# Altium PCB Placa_Alimentacion_v3.PcbDoc (part 1 of 2)
Units mm, origin at the board's own origin, x right, y up, seen from the top; angles counter-clockwise.
Board outline 100 x 70 mm, 2 copper layers (Top Layer, Bottom Layer), stack 1.571 mm thick; 157 components, 80 nets, 555 pads, 135 vias.
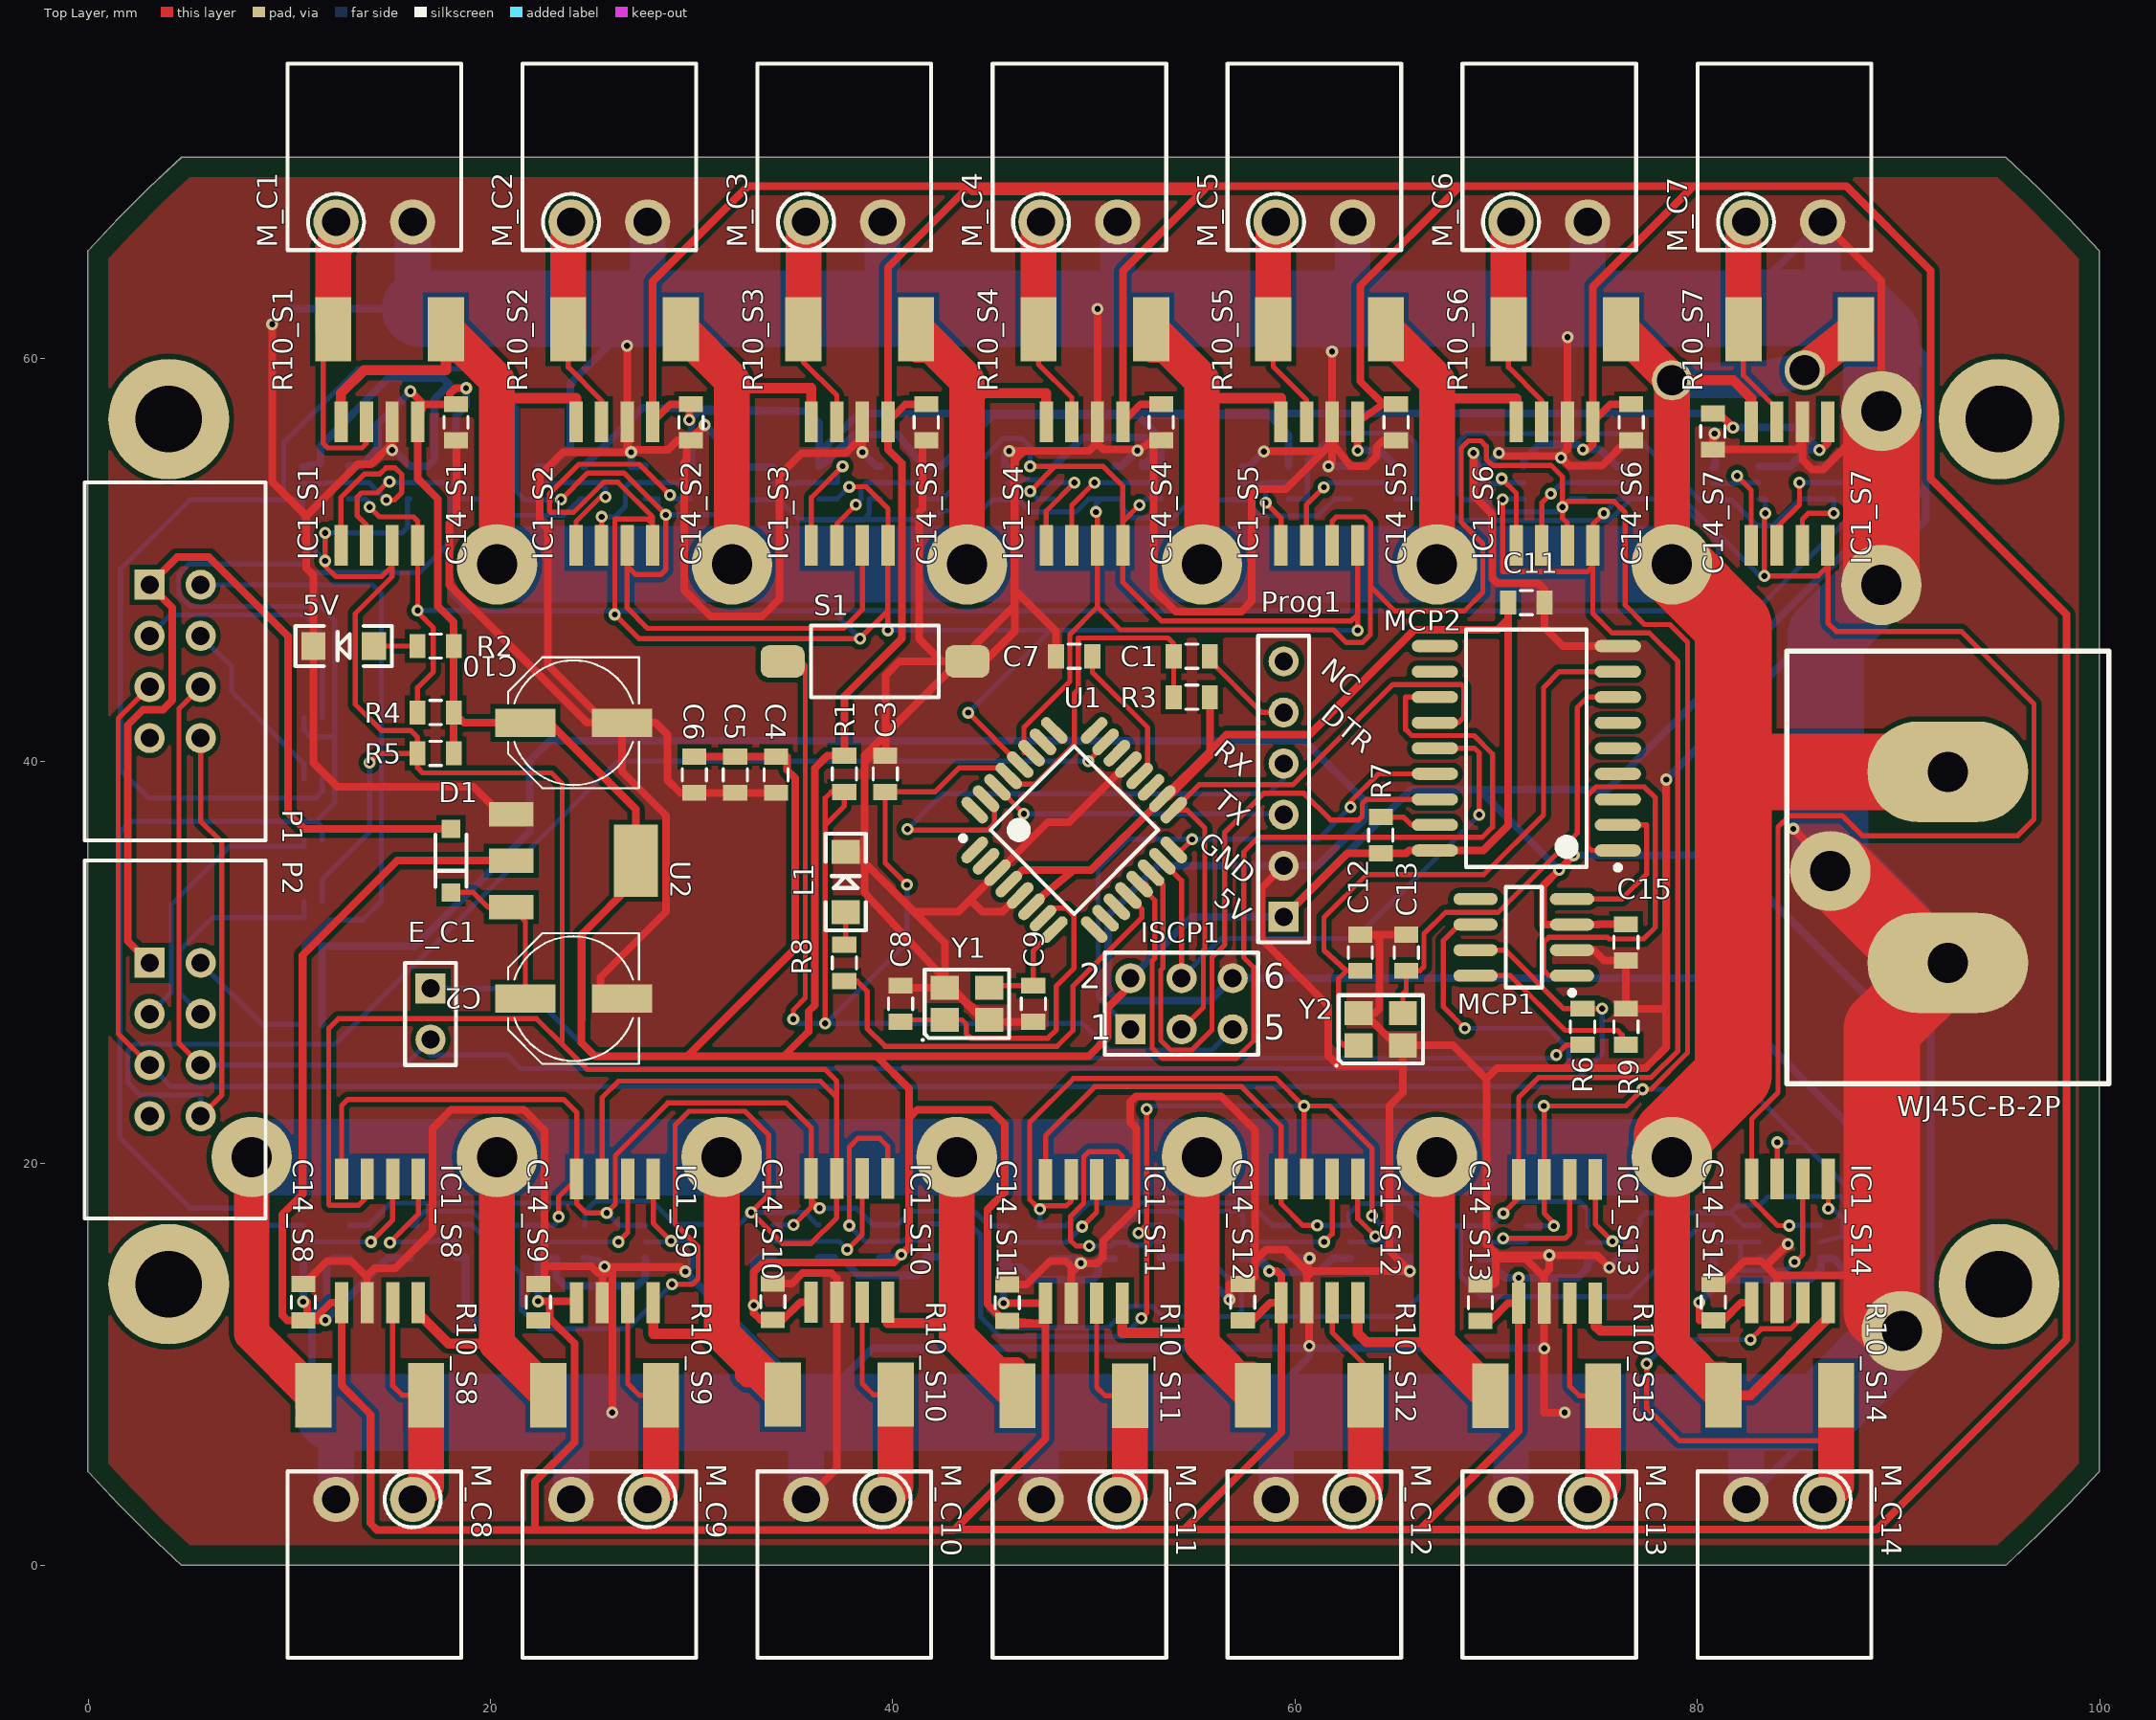
[diagram p0: Top Layer view]
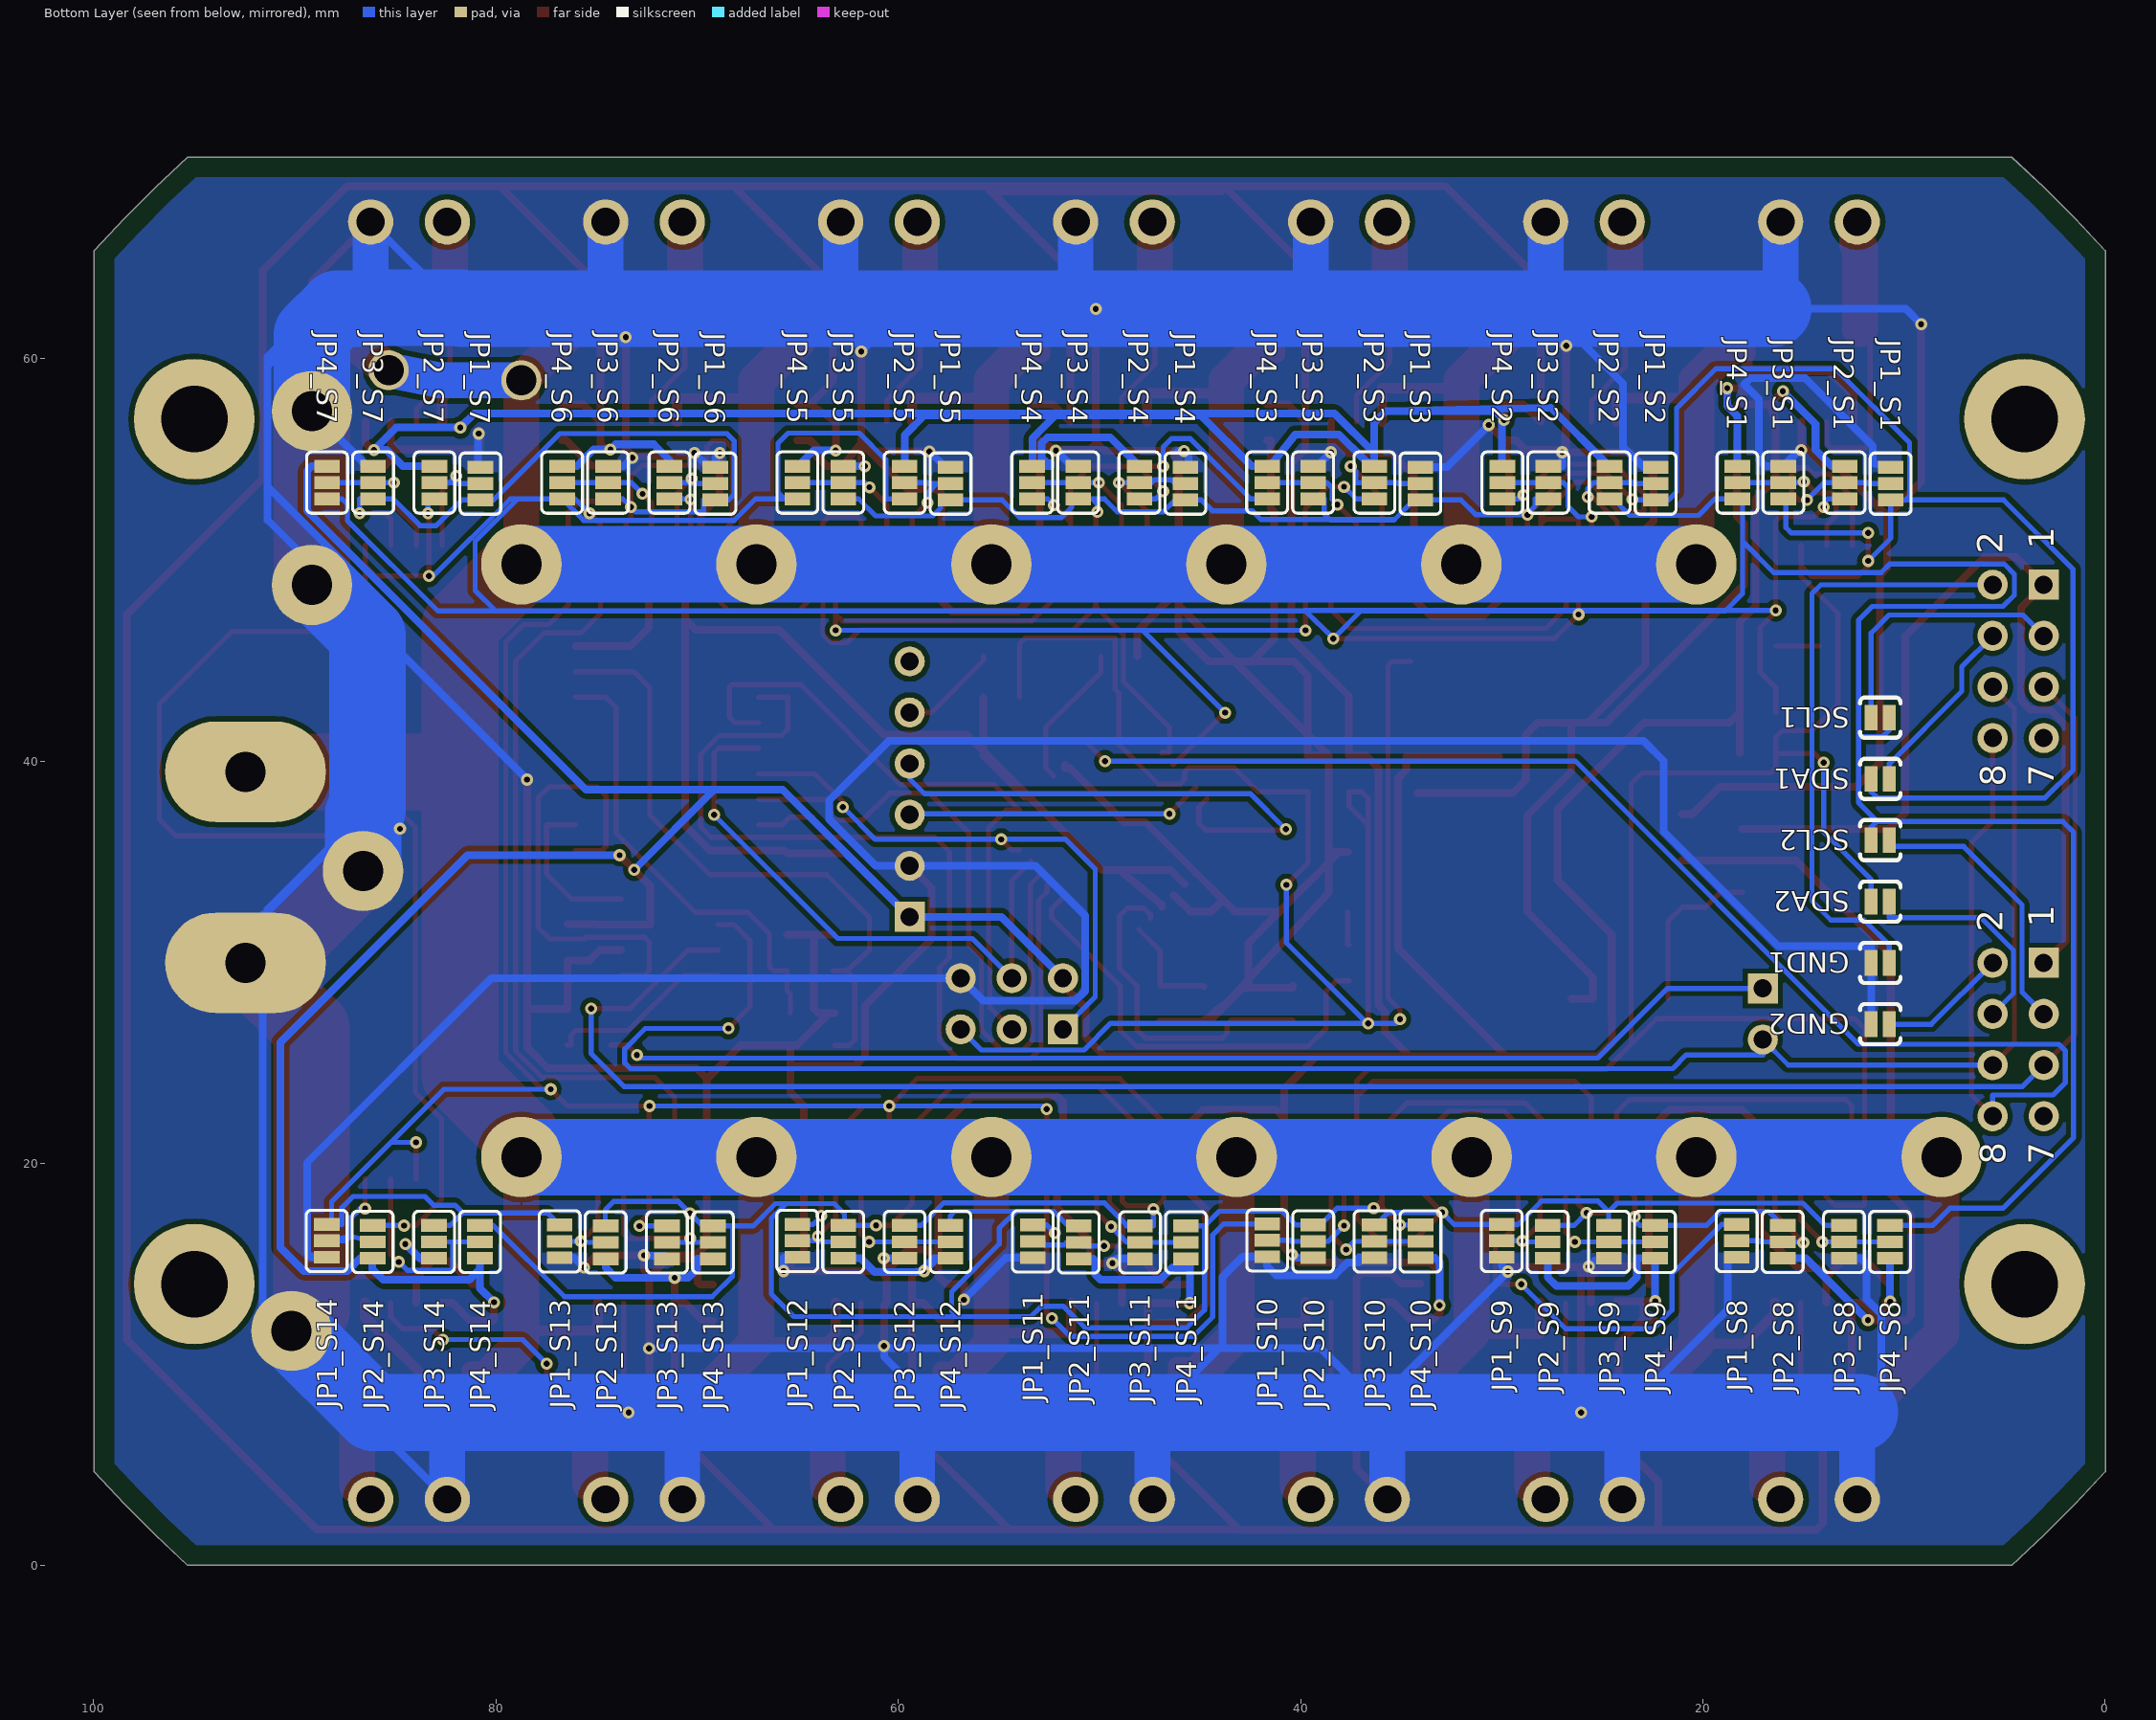
[diagram p1: Bottom Layer view, seen from below]
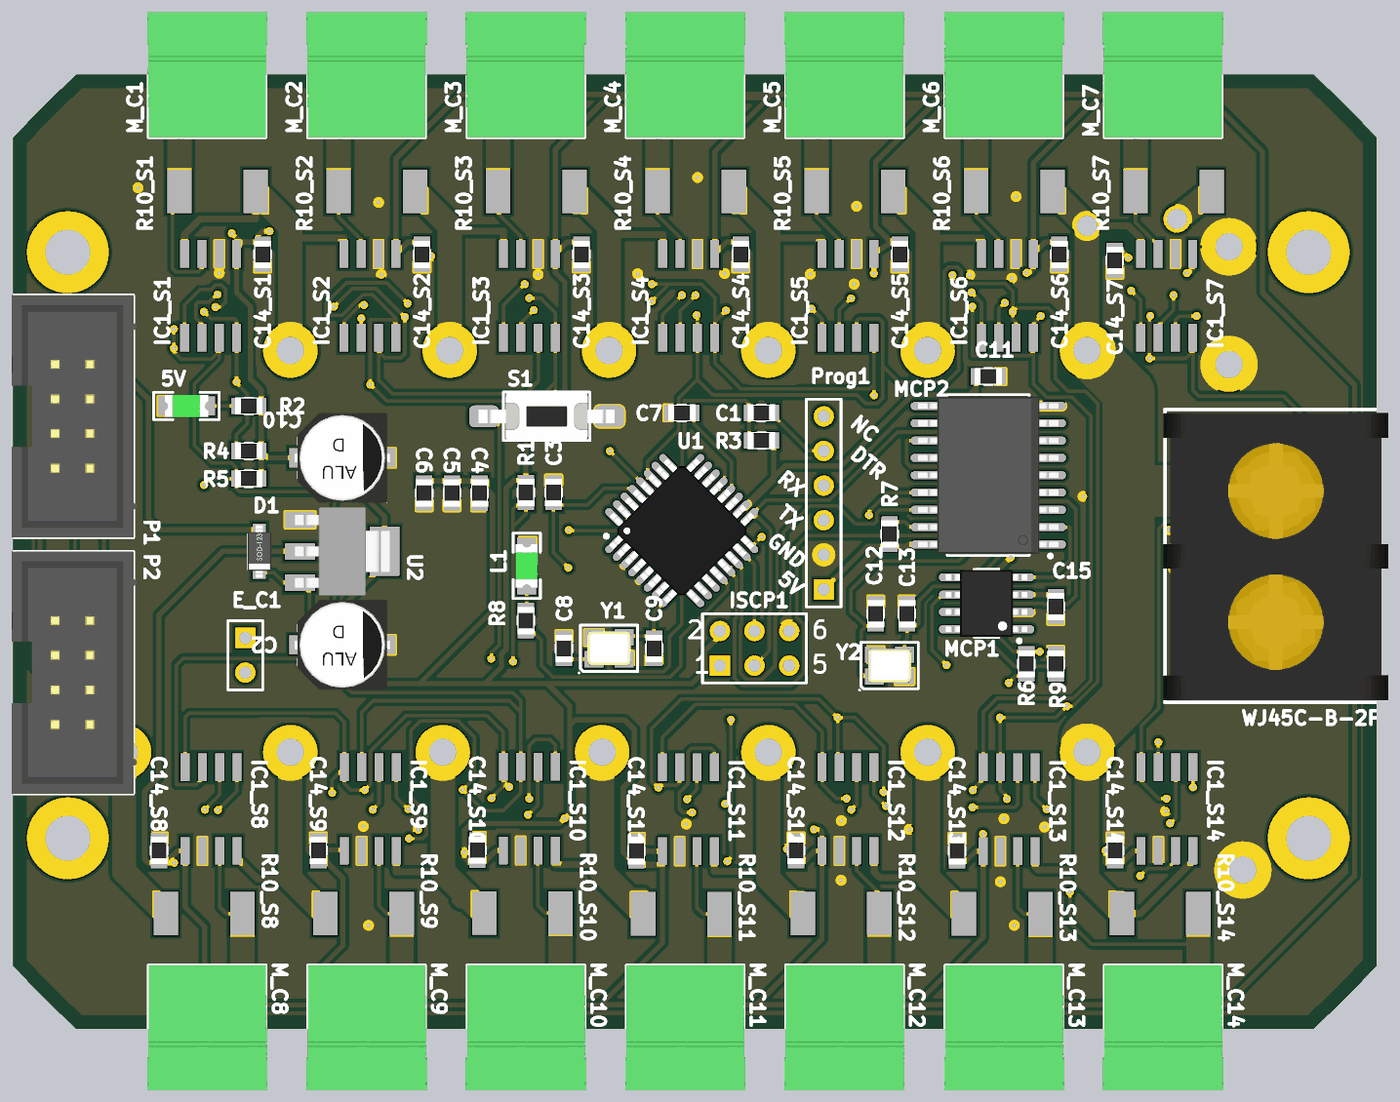
[diagram p3: 3D render of the assembled board from above, using the file's embedded part models]

## Layer stack, top to bottom
Top Solder: solder mask 0.0102, Solder Resist, Dk 3.5
Top Layer: signal copper 0.0356
Dielectric 1: dielectric 1.5, FR-4, Dk 4.8
Bottom Layer: signal copper 0.0356
Bottom Solder: solder mask 0.0102, Solder Resist, Dk 3.5

## Board outline
-0.016,49.637 -0.016,65.373 1.485,66.974 3.036,68.525 4.637,70.026 95.331,70.026 96.932,68.525 98.483,66.974 99.984,65.373 99.984,4.679 98.483,3.078 96.932,1.527 95.331,0.026 4.637,0.026 3.036,1.527 1.485,3.078 -0.016,4.679

## Design rules (kind name [scope] priority, off if disabled: settings)
BoardOutlineClearance [All] p1: gap=1 ignorepadtopadclearanceinfootprint=FALSE
Clearance Clearance_2 [InNamedPolygon('GND TOP PLANE')] p1: gap=0.254 ignorepadtopadclearanceinfootprint=FALSE
Clearance Clearance_1 [InNamedPolygon('GND BOTTOM PLANE')] p2: gap=0.254 ignorepadtopadclearanceinfootprint=FALSE
Clearance Clearance_JUMPER [InNet('GND') vs InNet('PGND')] p3: gap=0.05 ignorepadtopadclearanceinfootprint=FALSE
Clearance Clearance_POWER [InNet('24V') vs InNet('PGND')] p4: gap=0.381 ignorepadtopadclearanceinfootprint=FALSE
Clearance [All] p5: gap=0.152 ignorepadtopadclearanceinfootprint=FALSE
HoleSize [All] p1: absolutevalues=TRUE maxlimit=6.3 minlimit=0.3 maxpercent=80.000 minpercent=20.000
PlaneClearance [All] p1: clearance=5.016
PlaneConnect [All] p1: planeconnectstyle=Relief reliefexpansion=0.508 reliefentries=4 reliefconductorwidth=0.381 reliefairgap=-0.05
PolygonConnect [All] p1: connectstyle=Relief reliefconductorwidth=0.254 reliefentries=4 polygonreliefangle="90 Angle" airgapwidth=-0.05
RoomDefinition S14 [InComponentClass('S14')] p1: confinementstyle=ConfineIn formatcopy=TRUE lockcomponents=FALSE outline 90.83,21.26 77.368,21.26 77.368,5.512 90.83,5.512
RoomDefinition S13 [InComponentClass('S13')] p2: confinementstyle=ConfineIn formatcopy=TRUE lockcomponents=FALSE outline 79.248,21.234 65.786,21.234 65.786,5.486 79.248,5.486
RoomDefinition S12 [InComponentClass('S12')] p3: confinementstyle=ConfineIn formatcopy=TRUE lockcomponents=FALSE outline 67.437,21.26 53.975,21.26 53.975,5.512 67.437,5.512
RoomDefinition S11 [InComponentClass('S11')] p4: confinementstyle=ConfineIn formatcopy=TRUE lockcomponents=FALSE outline 55.728,21.234 42.266,21.234 42.266,5.486 55.728,5.486
RoomDefinition S10 [InComponentClass('S10')] p5: confinementstyle=ConfineIn formatcopy=TRUE lockcomponents=FALSE outline 44.069,21.285 30.607,21.285 30.607,5.537 44.069,5.537
RoomDefinition S9 [InComponentClass('S9')] p6: confinementstyle=ConfineIn formatcopy=TRUE lockcomponents=FALSE outline 32.41,21.26 18.948,21.26 18.948,5.512 32.41,5.512
RoomDefinition S8 [InComponentClass('S8')] p7: confinementstyle=ConfineIn formatcopy=TRUE lockcomponents=FALSE outline 20.726,21.26 7.264,21.26 7.264,5.512 20.726,5.512
RoomDefinition S7 [InComponentClass('S7')] p8: confinementstyle=ConfineIn formatcopy=TRUE lockcomponents=FALSE outline 78.238,48.717 91.7,48.717 91.7,64.465 78.238,64.465
RoomDefinition S6 [InComponentClass('S6')] p9: confinementstyle=ConfineIn formatcopy=TRUE lockcomponents=FALSE outline 66.554,48.717 80.016,48.717 80.016,64.465 66.554,64.465
RoomDefinition S5 [InComponentClass('S5')] p10: confinementstyle=ConfineIn formatcopy=TRUE lockcomponents=FALSE outline 54.858,48.717 68.32,48.717 68.32,64.465 54.858,64.465
RoomDefinition S4 [InComponentClass('S4')] p11: confinementstyle=ConfineIn formatcopy=TRUE lockcomponents=FALSE outline 43.186,48.717 56.648,48.717 56.648,64.465 43.186,64.465
RoomDefinition S3 [InComponentClass('S3')] p12: confinementstyle=ConfineIn formatcopy=TRUE lockcomponents=FALSE outline 31.502,48.717 44.964,48.717 44.964,64.465 31.502,64.465
RoomDefinition S2 [InComponentClass('S2')] p13: confinementstyle=ConfineIn formatcopy=TRUE lockcomponents=FALSE outline 19.806,48.717 33.268,48.717 33.268,64.465 19.806,64.465
RoomDefinition S1 [InComponentClass('S1')] p14: confinementstyle=ConfineIn formatcopy=TRUE lockcomponents=FALSE outline 8.122,48.717 21.584,48.717 21.584,64.465 8.122,64.465
RoutingVias RoutingVias_24V [InNet('24V')] p1: holewidth=0.5 width=0.8 viastyle="Through Hole" minholewidth=0.3 minwidth=0.6 maxholewidth=1 maxwidth=1.2
RoutingVias RoutingVias_PGND [InNet('PGND')] p2: holewidth=0.5 width=0.8 viastyle="Through Hole" minholewidth=0.3 minwidth=0.6 maxholewidth=1 maxwidth=1.2
RoutingVias RoutingVias_PGNDC [InNet('PGNDC')] p3: holewidth=0.5 width=0.8 viastyle="Through Hole" minholewidth=0.3 minwidth=0.6 maxholewidth=1 maxwidth=1.2
RoutingVias RoutingVias_MOTOR1 [InNet('MOTOR1')] p4: holewidth=0.5 width=0.8 viastyle="Through Hole" minholewidth=0.3 minwidth=0.6 maxholewidth=1 maxwidth=1.2
RoutingVias RoutingVias_MOTOR2 [InNet('MOTOR2')] p5: holewidth=0.5 width=0.8 viastyle="Through Hole" minholewidth=0.3 minwidth=0.6 maxholewidth=1 maxwidth=1.2
RoutingVias RoutingVias_C17_1 [InNet('NetC17_+')] p6: holewidth=0.5 width=0.8 viastyle="Through Hole" minholewidth=0.3 minwidth=0.6 maxholewidth=1 maxwidth=1.2
RoutingVias [All] p7: holewidth=0.3 width=0.6 viastyle="Through Hole" minholewidth=0.3 minwidth=0.6 maxholewidth=1 maxwidth=1.2
SMDNeckDown [All] p1: percent=120.000
SilkToSilkClearance [All] p1 off: silktosilkclearance=0.127
SolderMaskExpansion [All] p1: expansion=0.102
Width Width_Motor1 [InNet('MOTOR1')] p1: maxlimit=0.889 minlimit=0.7 preferedwidth=0.8
Width Width_Motor2 [InNet('MOTOR2')] p2: maxlimit=0.889 minlimit=0.7 preferedwidth=0.8
Width Width_24V [InNet('24V')] p3: maxlimit=10 minlimit=0.5 preferedwidth=0.8
Width Width_PGND [InNet('PGND')] p4: maxlimit=10 minlimit=0.6 preferedwidth=0.8
Width Width_PGNDC [InNet('PGNDC')] p5: maxlimit=10 minlimit=0.6 preferedwidth=0.8
Width Width_GND [InNet('GND')] p6: maxlimit=10 minlimit=0.254 preferedwidth=0.381 checkconnectedcopper=TRUE
Width Width_Vin [InNet('Vin')] p7: maxlimit=0.508 minlimit=0.254 preferedwidth=0.381 checkconnectedcopper=TRUE
Width Width_C17_1 [InNet('NetC17_+')] p8: maxlimit=0.508 minlimit=0.254 preferedwidth=0.381 checkconnectedcopper=TRUE
Width Width_5V [InNet('5V')] p9: maxlimit=0.381 minlimit=0.254 preferedwidth=0.381 checkconnectedcopper=TRUE
Width [All] p10: maxlimit=10 minlimit=0.254 preferedwidth=0.254
26 further rules are at their usual default settings.

## Classes and differential pairs
component class C1: M_C1
component class C2: M_C2
component class C3: M_C3
component class C4: M_C4
component class C5: M_C5
component class C6: M_C6
component class C7: M_C7
component class C8: M_C8
component class C9: M_C9
component class C10: M_C10
component class C11: M_C11
component class C12: M_C12
component class C13: M_C13
component class C14: M_C14
component class Placa_Alimentación: 5V C1 C2 C3 C4 C5 C6 C7 C8 C9 C10 C11 C12 C13 C15 D1 E_C1 GND GND1 GND2 ISCP1 L1 MCP1 MCP2 P1 P2 Prog1 R1 R2 R3 R4 R5 R6 R7 R8 R9 S1 SCL SCL1 SCL2 SDA SDA1 SDA2 U1 WJ45C-B-2P Y1 Y2
component class S1: C14_S1 JP1_S1 JP2_S1 JP3_S1 JP4_S1 R10_S1
component class S2: C14_S2 JP1_S2 JP2_S2 JP3_S2 JP4_S2 R10_S2
component class S3: C14_S3 JP1_S3 JP2_S3 JP3_S3 JP4_S3 R10_S3
component class S4: C14_S4 JP1_S4 JP2_S4 JP3_S4 JP4_S4 R10_S4
component class S5: C14_S5 JP1_S5 JP2_S5 JP3_S5 JP4_S5 R10_S5
component class S6: C14_S6 JP1_S6 JP2_S6 JP3_S6 JP4_S6 R10_S6
component class S7: C14_S7 JP1_S7 JP2_S7 JP3_S7 JP4_S7 R10_S7
component class S8: C14_S8 JP1_S8 JP2_S8 JP3_S8 JP4_S8 R10_S8
component class S9: C14_S9 JP1_S9 JP2_S9 JP3_S9 JP4_S9 R10_S9
component class S10: C14_S10 JP1_S10 JP2_S10 JP3_S10 JP4_S10 R10_S10
component class S11: C14_S11 JP1_S11 JP2_S11 JP3_S11 JP4_S11 R10_S11
component class S12: C14_S12 JP1_S12 JP2_S12 JP3_S12 JP4_S12 R10_S12
component class S13: C14_S13 JP1_S13 JP2_S13 JP3_S13 JP4_S13 R10_S13
component class S14: C14_S14 JP1_S14 JP2_S14 JP3_S14 JP4_S14 R10_S14
channel class Conector_Motor: C1 C2 C3 C4 C5 C6 C7 C8 C9 C10 C11 C12 C13 C14 C15 C16
channel class Sensor_Conjunto: S1 S2 S3 S4 S5 S6 S7 S8 S9 S10 S11 S12 S13 S14 S15 S16
net class Motor_Bus[1..14]: Motor_Bus1 Motor_Bus2 Motor_Bus3 Motor_Bus4 Motor_Bus5 Motor_Bus6 Motor_Bus7 Motor_Bus8 Motor_Bus9 Motor_Bus10 Motor_Bus11 Motor_Bus12 Motor_Bus13 Motor_Bus14

## Components (designator, comment, footprint, x,y, rotation, side; value= is the part's Value field where it differs from the comment)
5V "1206 LED" LED-1206 12.7,45.72 r180 top
C1 "100n" 0805 54.864,45.212 r0 top
C2 "47u" PANASONIC_D 24.13,28.194 r180 top
C3 "22p" 0805 39.624,39.37 r90 top
C4 "100n" 0805 34.198,39.324 r270 top
C5 "100n" 0805 32.166,39.324 r270 top
C6 "100n" 0805 30.134,39.324 r270 top
C7 "100n" 0805 49.022,45.212 r180 top
C8 "22p" 0805 40.386,27.94 r90 top
C9 "22p" 0805 46.99,27.94 r270 top
C10 "47u" PANASONIC_D 24.13,41.91 r180 top
C11 "100n" 0805 71.501,47.879 r0 top
C12 "22p" 0805 63.246,30.48 r90 top
C13 "22p" 0805 65.532,30.48 r90 top
C14_S1 "100n" 0805 18.282,56.845 r270 top (schematic designator C14)
C14_S2 "100n" 0805 29.966,56.845 r270 top (schematic designator C14)
C14_S3 "100n" 0805 41.662,56.845 r270 top (schematic designator C14)
C14_S4 "100n" 0805 53.346,56.845 r270 top (schematic designator C14)
C14_S5 "100n" 0805 65.018,56.845 r270 top (schematic designator C14)
C14_S6 "100n" 0805 76.714,56.845 r270 top (schematic designator C14)
C14_S7 "100n" 0805 80.772,56.388 r270 top (schematic designator C14)
C14_S8 "100n" 0805 10.693,13.106 r90 top (schematic designator C14)
C14_S9 "100n" 0805 22.377,13.106 r90 top (schematic designator C14)
C14_S10 "100n" 0805 34.036,13.132 r90 top (schematic designator C14)
C14_S11 "100n" 0805 45.695,13.081 r90 top (schematic designator C14)
C14_S12 "100n" 0805 57.404,13.106 r90 top (schematic designator C14)
C14_S13 "100n" 0805 69.215,13.081 r90 top (schematic designator C14)
C14_S14 "100n" 0805 80.797,13.106 r90 top (schematic designator C14)
C15 "100n" 0805 76.454,30.988 r270 top
D1 "SOD123-1A" SOD-123 18.034,35.052 r90 top
E_C1 "Header 2" HDR1X2 17.018,28.702 r270 top
GND1 "JUMPER-PAD-2-NOYES_SILK" PAD-JUMPER-2-NO_YES_SILK 11.176,29.972 r0 bottom
GND2 "JUMPER-PAD-2-NOYES_SILK" PAD-JUMPER-2-NO_YES_SILK 11.176,26.924 r0 bottom
IC1_S1 "INA219" SO08 14.472,53.797 r90 top (schematic designator IC1)
IC1_S2 "INA219" SO08 26.156,53.797 r90 top (schematic designator IC1)
IC1_S3 "INA219" SO08 37.852,53.797 r90 top (schematic designator IC1)
IC1_S4 "INA219" SO08 49.536,53.797 r90 top (schematic designator IC1)
IC1_S5 "INA219" SO08 61.208,53.797 r90 top (schematic designator IC1)
IC1_S6 "INA219" SO08 72.904,53.797 r90 top (schematic designator IC1)
IC1_S7 "INA219" SO08 84.588,53.797 r90 top (schematic designator IC1)
IC1_S8 "INA219" SO08 14.503,16.154 r270 top (schematic designator IC1)
IC1_S9 "INA219" SO08 26.187,16.154 r270 top (schematic designator IC1)
IC1_S10 "INA219" SO08 37.846,16.18 r270 top (schematic designator IC1)
IC1_S11 "INA219" SO08 49.505,16.129 r270 top (schematic designator IC1)
IC1_S12 "INA219" SO08 61.214,16.154 r270 top (schematic designator IC1)
IC1_S13 "INA219" SO08 73.025,16.129 r270 top (schematic designator IC1)
IC1_S14 "INA219" SO08 84.607,16.154 r270 top (schematic designator IC1)
ISCP1 "Header 3X2" HDR2X3 51.816,26.67 r0 top
JP1_S1 "JUMPER-PAD-3-NOYES_SILK" PAD-JUMPER-3-NO_YES_SILK 10.662,53.797 r270 bottom (schematic designator JP1)
JP1_S2 "JUMPER-PAD-3-NOYES_SILK" PAD-JUMPER-3-NO_YES_SILK 22.346,53.797 r270 bottom (schematic designator JP1)
JP1_S3 "JUMPER-PAD-3-NOYES_SILK" PAD-JUMPER-3-NO_YES_SILK 34.042,53.797 r270 bottom (schematic designator JP1)
JP1_S4 "JUMPER-PAD-3-NOYES_SILK" PAD-JUMPER-3-NO_YES_SILK 45.726,53.797 r270 bottom (schematic designator JP1)
JP1_S5 "JUMPER-PAD-3-NOYES_SILK" PAD-JUMPER-3-NO_YES_SILK 57.398,53.797 r270 bottom (schematic designator JP1)
JP1_S6 "JUMPER-PAD-3-NOYES_SILK" PAD-JUMPER-3-NO_YES_SILK 69.094,53.797 r270 bottom (schematic designator JP1)
JP1_S7 "JUMPER-PAD-3-NOYES_SILK" PAD-JUMPER-3-NO_YES_SILK 80.778,53.797 r270 bottom (schematic designator JP1)
JP1_S8 "JUMPER-PAD-3-NOYES_SILK" PAD-JUMPER-3-NO_YES_SILK 18.313,16.154 r90 bottom (schematic designator JP1)
JP1_S9 "JUMPER-PAD-3-NOYES_SILK" PAD-JUMPER-3-NO_YES_SILK 29.997,16.154 r90 bottom (schematic designator JP1)
JP1_S10 "JUMPER-PAD-3-NOYES_SILK" PAD-JUMPER-3-NO_YES_SILK 41.656,16.18 r90 bottom (schematic designator JP1)
JP1_S11 "JUMPER-PAD-3-NOYES_SILK" PAD-JUMPER-3-NO_YES_SILK 53.315,16.129 r90 bottom (schematic designator JP1)
JP1_S12 "JUMPER-PAD-3-NOYES_SILK" PAD-JUMPER-3-NO_YES_SILK 65.024,16.154 r90 bottom (schematic designator JP1)
JP1_S13 "JUMPER-PAD-3-NOYES_SILK" PAD-JUMPER-3-NO_YES_SILK 76.835,16.129 r90 bottom (schematic designator JP1)
JP1_S14 "JUMPER-PAD-3-NOYES_SILK" PAD-JUMPER-3-NO_YES_SILK 88.417,16.154 r90 bottom (schematic designator JP1)
JP2_S1 "JUMPER-PAD-3-NOYES_SILK" PAD-JUMPER-3-NO_YES_SILK 12.948,53.848 r270 bottom (schematic designator JP2)
JP2_S2 "JUMPER-PAD-3-NOYES_SILK" PAD-JUMPER-3-NO_YES_SILK 24.632,53.848 r270 bottom (schematic designator JP2)
JP2_S3 "JUMPER-PAD-3-NOYES_SILK" PAD-JUMPER-3-NO_YES_SILK 36.328,53.848 r270 bottom (schematic designator JP2)
JP2_S4 "JUMPER-PAD-3-NOYES_SILK" PAD-JUMPER-3-NO_YES_SILK 48.012,53.848 r270 bottom (schematic designator JP2)
JP2_S5 "JUMPER-PAD-3-NOYES_SILK" PAD-JUMPER-3-NO_YES_SILK 59.684,53.848 r270 bottom (schematic designator JP2)
JP2_S6 "JUMPER-PAD-3-NOYES_SILK" PAD-JUMPER-3-NO_YES_SILK 71.38,53.848 r270 bottom (schematic designator JP2)
JP2_S7 "JUMPER-PAD-3-NOYES_SILK" PAD-JUMPER-3-NO_YES_SILK 83.064,53.848 r270 bottom (schematic designator JP2)
JP2_S8 "JUMPER-PAD-3-NOYES_SILK" PAD-JUMPER-3-NO_YES_SILK 16.027,16.104 r90 bottom (schematic designator JP2)
JP2_S9 "JUMPER-PAD-3-NOYES_SILK" PAD-JUMPER-3-NO_YES_SILK 27.711,16.104 r90 bottom (schematic designator JP2)
JP2_S10 "JUMPER-PAD-3-NOYES_SILK" PAD-JUMPER-3-NO_YES_SILK 39.37,16.129 r90 bottom (schematic designator JP2)
JP2_S11 "JUMPER-PAD-3-NOYES_SILK" PAD-JUMPER-3-NO_YES_SILK 51.029,16.078 r90 bottom (schematic designator JP2)
JP2_S12 "JUMPER-PAD-3-NOYES_SILK" PAD-JUMPER-3-NO_YES_SILK 62.738,16.104 r90 bottom (schematic designator JP2)
JP2_S13 "JUMPER-PAD-3-NOYES_SILK" PAD-JUMPER-3-NO_YES_SILK 74.549,16.078 r90 bottom (schematic designator JP2)
JP2_S14 "JUMPER-PAD-3-NOYES_SILK" PAD-JUMPER-3-NO_YES_SILK 86.131,16.104 r90 bottom (schematic designator JP2)
JP3_S1 "JUMPER-PAD-3-NOYES_SILK" PAD-JUMPER-3-NO_YES_SILK 15.996,53.848 r270 bottom (schematic designator JP3)
JP3_S2 "JUMPER-PAD-3-NOYES_SILK" PAD-JUMPER-3-NO_YES_SILK 27.68,53.848 r270 bottom (schematic designator JP3)
JP3_S3 "JUMPER-PAD-3-NOYES_SILK" PAD-JUMPER-3-NO_YES_SILK 39.376,53.848 r270 bottom (schematic designator JP3)
JP3_S4 "JUMPER-PAD-3-NOYES_SILK" PAD-JUMPER-3-NO_YES_SILK 51.06,53.848 r270 bottom (schematic designator JP3)
JP3_S5 "JUMPER-PAD-3-NOYES_SILK" PAD-JUMPER-3-NO_YES_SILK 62.732,53.848 r270 bottom (schematic designator JP3)
JP3_S6 "JUMPER-PAD-3-NOYES_SILK" PAD-JUMPER-3-NO_YES_SILK 74.428,53.848 r270 bottom (schematic designator JP3)
JP3_S7 "JUMPER-PAD-3-NOYES_SILK" PAD-JUMPER-3-NO_YES_SILK 86.112,53.848 r270 bottom (schematic designator JP3)
JP3_S8 "JUMPER-PAD-3-NOYES_SILK" PAD-JUMPER-3-NO_YES_SILK 12.979,16.104 r90 bottom (schematic designator JP3)
JP3_S9 "JUMPER-PAD-3-NOYES_SILK" PAD-JUMPER-3-NO_YES_SILK 24.663,16.104 r90 bottom (schematic designator JP3)
JP3_S10 "JUMPER-PAD-3-NOYES_SILK" PAD-JUMPER-3-NO_YES_SILK 36.322,16.129 r90 bottom (schematic designator JP3)
JP3_S11 "JUMPER-PAD-3-NOYES_SILK" PAD-JUMPER-3-NO_YES_SILK 47.981,16.078 r90 bottom (schematic designator JP3)
JP3_S12 "JUMPER-PAD-3-NOYES_SILK" PAD-JUMPER-3-NO_YES_SILK 59.69,16.104 r90 bottom (schematic designator JP3)
JP3_S13 "JUMPER-PAD-3-NOYES_SILK" PAD-JUMPER-3-NO_YES_SILK 71.501,16.078 r90 bottom (schematic designator JP3)
JP3_S14 "JUMPER-PAD-3-NOYES_SILK" PAD-JUMPER-3-NO_YES_SILK 83.083,16.104 r90 bottom (schematic designator JP3)
JP4_S1 "JUMPER-PAD-3-NOYES_SILK" PAD-JUMPER-3-NO_YES_SILK 18.282,53.848 r270 bottom (schematic designator JP4)
JP4_S2 "JUMPER-PAD-3-NOYES_SILK" PAD-JUMPER-3-NO_YES_SILK 29.966,53.848 r270 bottom (schematic designator JP4)
JP4_S3 "JUMPER-PAD-3-NOYES_SILK" PAD-JUMPER-3-NO_YES_SILK 41.662,53.848 r270 bottom (schematic designator JP4)
JP4_S4 "JUMPER-PAD-3-NOYES_SILK" PAD-JUMPER-3-NO_YES_SILK 53.346,53.848 r270 bottom (schematic designator JP4)
JP4_S5 "JUMPER-PAD-3-NOYES_SILK" PAD-JUMPER-3-NO_YES_SILK 65.018,53.848 r270 bottom (schematic designator JP4)
JP4_S6 "JUMPER-PAD-3-NOYES_SILK" PAD-JUMPER-3-NO_YES_SILK 76.714,53.848 r270 bottom (schematic designator JP4)
JP4_S7 "JUMPER-PAD-3-NOYES_SILK" PAD-JUMPER-3-NO_YES_SILK 88.398,53.848 r270 bottom (schematic designator JP4)
JP4_S8 "JUMPER-PAD-3-NOYES_SILK" PAD-JUMPER-3-NO_YES_SILK 10.693,16.104 r90 bottom (schematic designator JP4)
JP4_S9 "JUMPER-PAD-3-NOYES_SILK" PAD-JUMPER-3-NO_YES_SILK 22.377,16.104 r90 bottom (schematic designator JP4)
JP4_S10 "JUMPER-PAD-3-NOYES_SILK" PAD-JUMPER-3-NO_YES_SILK 34.036,16.129 r90 bottom (schematic designator JP4)
JP4_S11 "JUMPER-PAD-3-NOYES_SILK" PAD-JUMPER-3-NO_YES_SILK 45.695,16.078 r90 bottom (schematic designator JP4)
JP4_S12 "JUMPER-PAD-3-NOYES_SILK" PAD-JUMPER-3-NO_YES_SILK 57.404,16.104 r90 bottom (schematic designator JP4)
JP4_S13 "JUMPER-PAD-3-NOYES_SILK" PAD-JUMPER-3-NO_YES_SILK 69.215,16.078 r90 bottom (schematic designator JP4)
JP4_S14 "JUMPER-PAD-3-NOYES_SILK" PAD-JUMPER-3-NO_YES_SILK 80.797,16.104 r90 bottom (schematic designator JP4)
L1 "1206 LED" LED-1206 37.654,33.99 r90 top
M_C1 "20020110-D021A01LF" "FCI 06-381-2PIN" 14.224,70.104 r0 top (schematic designator M)
M_C2 "20020110-D021A01LF" "FCI 06-381-2PIN" 25.908,70.104 r0 top (schematic designator M)
M_C3 "20020110-D021A01LF" "FCI 06-381-2PIN" 37.592,70.104 r0 top (schematic designator M)
M_C4 "20020110-D021A01LF" "FCI 06-381-2PIN" 49.276,70.104 r0 top (schematic designator M)
M_C5 "20020110-D021A01LF" "FCI 06-381-2PIN" 60.96,70.104 r0 top (schematic designator M)
M_C6 "20020110-D021A01LF" "FCI 06-381-2PIN" 72.644,70.104 r0 top (schematic designator M)
M_C7 "20020110-D021A01LF" "FCI 06-381-2PIN" 84.328,70.104 r0 top (schematic designator M)
M_C8 "20020110-D021A01LF" "FCI 06-381-2PIN" 14.224,0 r180 top (schematic designator M)
M_C9 "20020110-D021A01LF" "FCI 06-381-2PIN" 25.908,0 r180 top (schematic designator M)
M_C10 "20020110-D021A01LF" "FCI 06-381-2PIN" 37.592,0 r180 top (schematic designator M)
M_C11 "20020110-D021A01LF" "FCI 06-381-2PIN" 49.276,0 r180 top (schematic designator M)
M_C12 "20020110-D021A01LF" "FCI 06-381-2PIN" 60.96,0 r180 top (schematic designator M)
M_C13 "20020110-D021A01LF" "FCI 06-381-2PIN" 72.644,0 r180 top (schematic designator M)
M_C14 "20020110-D021A01LF" "FCI 06-381-2PIN" 84.328,0 r180 top (schematic designator M)
MCP1 "MCP2551T-I/SN" SOIC-SN8_N 71.374,31.242 r180 top
MCP2 "MCP2515T-E/SO" SOIC-SO18_N 71.501,40.64 r180 top
P1 "IDC2X4" IDC2X4 4.318,44.958 r270 top
P2 "IDC2X4" IDC2X4 4.318,26.162 r270 top
Prog1 "Header 6" HDR1X6 59.436,32.258 r90 top
R1 "10K" 0805 37.592,39.37 r90 top
R2 "560" 0805 17.272,45.72 r0 top
R3 "10K" 0805 54.864,43.18 r180 top
R4 "0" 0805 17.272,42.418 r0 top
R5 "0" 0805 17.272,40.386 r0 top
R6 "124" 0805 74.295,26.797 r270 top
R7 "10K" 0805 64.262,36.322 r270 top
R8 "560" 0805 37.592,29.972 r270 top
R9 "4.7K" 0805 76.454,26.797 r270 top
R10_S1 "0.012 2W" R2512 14.98,61.468 r0 top (schematic designator R10)
R10_S2 "0.012 2W" R2512 26.664,61.468 r0 top (schematic designator R10)
R10_S3 "0.012 2W" R2512 38.36,61.468 r0 top (schematic designator R10)
R10_S4 "0.012 2W" R2512 50.044,61.468 r0 top (schematic designator R10)
R10_S5 "0.012 2W" R2512 61.716,61.468 r0 top (schematic designator R10)
R10_S6 "0.012 2W" R2512 73.412,61.468 r0 top (schematic designator R10)
R10_S7 "0.012 2W" R2512 85.096,61.468 r0 top (schematic designator R10)
R10_S8 "0.012 2W" R2512 13.995,8.484 r180 top (schematic designator R10)
R10_S9 "0.012 2W" R2512 25.679,8.484 r180 top (schematic designator R10)
R10_S10 "0.012 2W" R2512 37.338,8.509 r180 top (schematic designator R10)
R10_S11 "0.012 2W" R2512 48.997,8.458 r180 top (schematic designator R10)
R10_S12 "0.012 2W" R2512 60.706,8.484 r180 top (schematic designator R10)
R10_S13 "0.012 2W" R2512 72.517,8.458 r180 top (schematic designator R10)
R10_S14 "0.012 2W" R2512 84.099,8.484 r180 top (schematic designator R10)
S1 "FSMSMTR" "TE FSMSMTR" 39.116,44.958 r90 top
SCL1 "JUMPER-PAD-2-NOYES_SILK" PAD-JUMPER-2-NO_YES_SILK 11.176,42.164 r0 bottom
SCL2 "JUMPER-PAD-2-NOYES_SILK" PAD-JUMPER-2-NO_YES_SILK 11.176,36.068 r180 bottom
SDA1 "JUMPER-PAD-2-NOYES_SILK" PAD-JUMPER-2-NO_YES_SILK 11.176,39.116 r0 bottom
SDA2 "JUMPER-PAD-2-NOYES_SILK" PAD-JUMPER-2-NO_YES_SILK 11.176,33.02 r0 bottom
U1 "ATmega328P-AU" 32A_N 49.022,36.576 r45 top
U2 "NCP1117" SOT223 24.13,35.052 r270 top
WJ45C-B-2P "WJ45C-B-2P" WJ45C-B-2P 92.456,29.972 r90 top
Y1 "16MHz" "NDK NX3225SA" 43.688,27.94 r0 top
Y2 "16MHz" "NDK NX3225SA" 64.262,26.67 r0 top

## Footprints (in the part's own frame and the unit in brackets; to place one, negate y for a bottom-side part, rotate by r counter-clockwise, add the part's x,y. Pads: shape width x height; smd on the part's side, far side on the other; paste and mask are expansions set on the pad)
32A_N [mm] "Thin QFP, 32-Leads, Body 7x7mm, Pitch 0.8mm, IPC Medium Density"
  oval 1.65x0.55 smd: 1(-4.2,2.8) 2(-4.2,2) 3(-4.2,1.2) 4(-4.2,0.4) 5(-4.2,-0.4) 6(-4.2,-1.2) 7(-4.2,-2) 8(-4.2,-2.8) 17(4.2,-2.8) 18(4.2,-2) 19(4.2,-1.2) 20(4.2,-0.4) 21(4.2,0.4) 22(4.2,1.2) 23(4.2,2) 24(4.2,2.8)
  oval 0.55x1.65 smd: 9(-2.8,-4.2) 10(-2,-4.2) 11(-1.2,-4.2) 12(-0.4,-4.2) 13(0.4,-4.2) 14(1.2,-4.2) 15(2,-4.2) 16(2.8,-4.2) 25(2.8,4.2) 26(2,4.2) 27(1.2,4.2) 28(0.4,4.2) 29(-0.4,4.2) 30(-1.2,4.2) 31(-2,4.2) 32(-2.8,4.2)
  silkscreen extent -4.32,-2.95 2.95,3.75, body extent -4.52,-4.53 4.5,4.5, height 1.15
0805 [mil]
  rect 31.5x47.24 smd: 1(-35.43,0) 2(35.43,0)
  silkscreen extent -12,-24 12,24, body extent -39,-25 39,25, height 20
"FCI 06-381-2PIN" [mm] "FCI Pluggable Terminal Block"
  round 2.25 hole 1.4: 1(-1.905,-3.302) 2(1.905,-3.302)
  silkscreen extent -4.32,-4.7 4.32,4.57, body extent -4.4,-4.7 4.4,4.5, height 7.6
HDR1X2 [mm] "Connector; Header; 2 Position"
  rect 1.5x1.5 hole 0.9: 1(0,0)
  round 1.5 hole 0.9: 2(2.54,0)
  silkscreen extent -1.27,-1.27 3.81,1.27
HDR1X6 [mm] "Connector; Header; 6 Position"
  rect 1.5x1.5 hole 0.9: 1(0,0)
  round 1.5 hole 0.9: 2(2.54,0) 3(5.08,0) 4(7.62,0) 5(10.16,0) 6(12.7,0)
  silkscreen extent -1.27,-1.27 13.97,1.27
HDR2X3 [mm] "Connector; Header; 3x2 Position"
  rect 1.5x1.5 hole 0.9: 1(0,0)
  round 1.5 hole 0.9: 2(0,2.54) 3(2.54,0) 4(2.54,2.54) 5(5.08,0) 6(5.08,2.54)
  silkscreen extent -1.27,-1.27 6.35,3.81
IDC2X4 [mm] "IDC Connector 2x4"
  rect 1.5x1.5 hole 0.9: 1(-3.81,-1.27)
  round 1.5 hole 0.9: 2(-3.81,1.27) 3(-1.27,-1.27) 4(-1.27,1.27) 5(1.27,-1.27) 6(1.27,1.27) 7(3.81,-1.27) 8(3.81,1.27)
  silkscreen extent -8.9,-4.5 8.9,4.5, body extent -8.89,-4.45 8.89,4.76, height 9.01
LED-1206 [mm]
  rect 1.2x1.4 smd: A(-1.5,0) C(1.5,0)
  silkscreen extent -2.4,-1 2.4,1, body extent -1.6,-0.8 1.6,0.8, height 1.11
"NDK NX3225SA" [mm] "Crystal, 4-Leads, Body 2.50x3.20mm, Pitch 2.20mm, IPC Medium Density"
  rect 1.4x1.2 smd: 1(-1.1,-0.8) 2(1.1,-0.8) 3(1.1,0.8) 4(-1.1,0.8)
  silkscreen extent -2.25,-1.85 2.1,1.7, body extent -1.61,-1.26 1.61,1.26, height 0.6
PAD-JUMPER-2-NO_YES_SILK [mm]
  rect 0.635x1.27 smd: 1(-0.45,0) 2(0.45,0)
  silkscreen extent -1,-1 1,1
PAD-JUMPER-3-NO_YES_SILK [mil]
  rect 25x50 smd: 1(-32,0) 2(0,0) 3(32,0)
  silkscreen extent -60,-40 60,40
PANASONIC_D [mm]
  rect 3x1.4 smd: +(2.4,0) -(-2.4,0)
  silkscreen extent -3.25,-3.25 3.25,3.25, body extent -3.5,-3.3 3.5,3.3, height 5.4
R2512 [mm]
  rect 1.8x3.2 smd: 1(-2.8,0) 2(2.8,0)
SO08 [mil]
  rect 80x26 smd: 1(-121,75) 2(-121,25) 3(-121,-25) 4(-121,-75) 5(121,-75) 6(121,-25) 7(121,25) 8(121,75)
SOD-123 [mm]
  rect 0.9x0.95 smd: A(1.575,0) C(-1.575,0)
  silkscreen extent -1.3,-0.77 1.3,0.77, body extent -1.93,-0.86 1.92,0.84, height 1.46
SOIC-SN8_N [mm] "SOIC, 8-Leads, Body 4.9x3.8mm, Pitch 1.27mm, IPC Medium Density"
  oval 2.2x0.6 smd: 1(-2.4,1.905) 2(-2.4,0.635) 3(-2.4,-0.635) 4(-2.4,-1.905) 5(2.4,-1.905) 6(2.4,-0.635) 7(2.4,0.635) 8(2.4,1.905)
  silkscreen extent -2.53,-2.5 0.9,2.88, body extent -3,-2.45 3,2.45, height 1.75
SOIC-SO18_N [mm] "SOIC, 18-Leads, Body 11.5x7.5mm, Pitch 1.27mm, IPC Medium Density"
  oval 2.3x0.6 smd: 1(-4.55,5.08) 2(-4.55,3.81) 3(-4.55,2.54) 4(-4.55,1.27) 5(-4.55,0) 6(-4.55,-1.27) 7(-4.55,-2.54) 8(-4.55,-3.81) 9(-4.55,-5.08) 10(4.55,-5.08) 11(4.55,-3.81) 12(4.55,-2.54) 13(4.55,-1.27) 14(4.55,0) 15(4.55,1.27) 16(4.55,2.54) 17(4.55,3.81) 18(4.55,5.08)
  silkscreen extent -4.67,-5.9 3,6.05, body extent -5.15,-5.77 5.15,5.76, height 2.65
SOT223 [mil]
  rect 48x88 smd: 1(-91,-122) 2(0,-122) 3(91,-122)
  rect 141.73x86.61 smd: 4(0,122.01)
  body extent -128,-136 128,136, height 63
"TE FSMSMTR" [mm]
  rrect50% 1.6x2.19 smd: 1(0,4.595) 2(0,-4.595)
  silkscreen extent -1.78,-3.17 1.78,3.17, body extent -1.75,-4.98 1.75,4.98, height 4.42
WJ45C-B-2P [mm]
  oval 5x8 hole 2: 1(0,0) 2(9.5,0)
  silkscreen extent -6,-8 15.5,8, body extent -5.83,-8.38 15.22,8.12, height 18.5

## Part data
5V L1: library part LED1206
C1 C3 C4 C5 C6 C7 C8 C9 C11 C12 C13 C14_S1 C14_S2 C14_S3 C14_S4 C14_S5 C14_S6 C14_S7 C14_S8 C14_S9 C14_S10 C14_S11 C14_S12 C14_S13 C14_S14 C15: library part CAP0805
C2 C10: library part 47UF-50V-20%(ELECT), PROD_ID=CAP-10547
D1: library part DIODESOD123
E_C1: "Header, 2-Pin", LatestRevisionDate=17-Jul-2002, LatestRevisionNote="Re-released for DXP Platform.", Publisher="Altium Limited"
IC1_S1 IC1_S2 IC1_S3 IC1_S4 IC1_S5 IC1_S6 IC1_S7 IC1_S8 IC1_S9 IC1_S10 IC1_S11 IC1_S12 IC1_S13 IC1_S14: library part INA219-SO8D
ISCP1: "Header, 3-Pin, Dual row", LatestRevisionDate=17-Jul-2002, LatestRevisionNote="Re-released for DXP Platform.", Publisher="Altium Limited"
M_C1 M_C2 M_C3 M_C4 M_C5 M_C6 M_C7 M_C8 M_C9 M_C10 M_C11 M_C12 M_C13 M_C14: "TERM BLOCK HDR 2POS R/A 3.81MM", Colour=Green, Manufacturer=FCI, Supplier Part Number 1=609-3819-ND, TemperatureRange="-40C ~ 115C", Voltage=300V, ComponentLink1Description=Datasheet, ComponentLink1URL=http://portal.fciconnect.com/Comergent//fci/drawing/20020110.pdf, ComponentLink2Description="Digi-Key Listing", ComponentLink2URL=http://www.digikey.ca/product-detail/en/20020110-D021A01LF/609-3819-ND/2261255, Number Of Levels=1, Number Of Positions=2, Orientation="90, Right Angle", PartId=7785, Part Number=20020110-D021A01LF, Pitch="0.150\" (3.81mm)", Positions Per Level=2, Price=0,75, Supplier 1=Digi-Key, Type="Through Hole"
MCP1: "High-Speed CAN Transceiver, 8-Pin SOIC, Industrial Temperature, Tape and Reel", Supplier Part Number 1=MCP2551T-I/SNTR-ND, Code_IPC=SOIC127P600-8, Code_JEDEC=MS-012, ComponentLink1Description=Datasheet, ComponentLink1URL=http://ww1.microchip.com/downloads/en/DeviceDoc/21667E.pdf, ComponentLink2Description="Packaging Specification", ComponentLink2URL=http://www.microchip.com/stellent/groups/techpub_sg/documents/packagingspec/en012702.pdf, ComponentLink3Description="Microchip.com Home", ComponentLink3URL=http://www.microchip.com/, DatasheetVersion="revE, Jan-2007", PackageDescription="8-Lead Plastic Small Outline (SN) - Narrow, 3.90mm Body [SOIC]", PackageReference=SOIC-SN8, PackageVersion="revBB, Aug-2009", Published=29-Jan-2009, Publisher="Altium Limited", Supplier 1=Digi-Key, Supplier 2=Farnell, Supplier Part Number 2=1788569
MCP2: "Stand-Alone CAN Controller With SPI Interface, 18-Pin SOIC, Extended Temperature, Tape and Reel", Supplier Part Number 1=MCP2515T-E/SO-ND, Code_JEDEC=MS-013, ComponentLink1Description=Datasheet, ComponentLink1URL=http://ww1.microchip.com/downloads/en/DeviceDoc/21801e.pdf, ComponentLink2Description="Packaging Specification", ComponentLink2URL=http://www.microchip.com/stellent/groups/techpub_sg/documents/packagingspec/en012702.pdf, ComponentLink3Description="Microchip.com Home", ComponentLink3URL=http://www.microchip.com/, DatasheetVersion="revE, Nov-2007", PackageDescription="18-Lead Plastic Small Outline (SO) - Wide 7.50mm Body [SOIC]", PackageReference=SOIC-SO18, PackageVersion="revBB, Aug-2009", Published=29-Jan-2009, Publisher="Altium Limited", Supplier 1=Digi-Key
P1 P2: "Header, 4-Pin, Dual row", LatestRevisionDate=17-Jul-2002, LatestRevisionNote="Re-released for DXP Platform.", Publisher="Altium Limited"
Prog1: "Header, 6-Pin", LatestRevisionDate=17-Jul-2002, LatestRevisionNote="Re-released for DXP Platform.", Publisher="Altium Limited"
R1 R2 R3 R4 R5 R6 R7 R8 R9: library part RESISTOR0805-RES
R10_S1 R10_S2 R10_S3 R10_S4 R10_S5 R10_S6 R10_S7 R10_S8 R10_S9 R10_S10 R10_S11 R10_S12 R10_S13 R10_S14: library part RESISTOR2512
S1: "SWITCH TACTILE SPST-NO 0.05A 24V", Contact Rating @ Voltage="0.05A @ 24VDC", Illumination Type, Colour=-, Manufacturer="TE Connectivity Alcoswitch Switches", Operating Force=180gf, Operating Temperature="-35C ~ 85C", Supplier Part Number 1=450-1758-2-ND, Actuator Orientation="Top Actuated", Actuator Type=Standard, Circuit=SPST-NO, ComponentLink1Description=Datasheet, ComponentLink1URL=http://www.te.com/commerce/DocumentDelivery/DDEController?Action=srchrtrv&DocNm=1437566-3&DocType=Customer+Drawing&DocLang=English, ComponentLink2Description="Digi-Key Listing", ComponentLink2URL=http://www.digikey.com/product-detail/en/FSMSMTR/450-1758-2-ND/529671, Illumination=Non-Illuminated, Illumination Voltage=-, Mechanical Life="20,000 Cycles", PartId=8251, Part Number=FSMSMTR, Price=0,175, Supplier 1=Digi-Key, Switch Function=Off-Mom, Switch Travel=0.25mm
U1: "8-bit AVR Microcontroller, 32KB Flash, 1KB EEPROM, 2KB SRAM, 32-pin TQFP, Industrial Grade (-40°C to 85°C)", Supplier Part Number 1=ATMEGA328P-AU-ND, Code_JEDEC=MS-026-ABA, ComponentLink1Description="Manufacturer Link", ComponentLink1URL=http://www.atmel.com/products/avr/default.asp?, ComponentLink2Description="ATmega48A/48PA/88A/88PA/168A/168PA/328/328P Datasheet", ComponentLink2URL=http://www.atmel.com/dyn/resources/prod_documents/8271.pdf, ComponentLink3Description="ATmega48A/48PA/88A/88PA/168A/168PA/328/328P Summary", ComponentLink3URL=http://www.atmel.com/dyn/resources/prod_documents/8271S.pdf, ComponentLink4Description="Atmel.com Home", ComponentLink4URL=http://www.atmel.com, DatasheetVersion="revA, Jan-2010", PackageDescription="32-Lead, 7x7x1.0 mm Body, 0.8mm Lead Pitch, Thin Profile Plastic Quad Flat Package (TQFP)", PackageReference=32A, PackageVersion="revB, Oct-2001", Published=1-Apr-2010, Publisher="Altium Limited", Supplier 1=Digi-Key, Supplier 2=Farnell, Supplier 3=Mouser, Supplier Part Number 2=1715486, Supplier Part Number 3=556-ATMEGA328P-AU
U2: library part V_REG_LM1117SOT223, PROD_ID=VREG-08170
Y1 Y2: library part NX3225SA-16.000MHZ-STD-CSR-1, "CRYSTAL 16.0000MHZ 8PF SMD", Device Package="4-SMD, No Lead (DFN, LCC)", Frequency Stability=15ppm, Load Capacitance=8pF, Manufacturer=NDK, Operating Mode=Fundamental, Supplier Part Number 1=644-1049-2-ND, ComponentLink1Description=Datasheet, ComponentLink1URL=http://media.digikey.com/pdf/Data%20Sheets/NDK%20PDFs/NX3225SA.pdf, ComponentLink2Description="Digi-Key Listing", ComponentLink2URL=http://www.digikey.com/product-detail/en/NX3225SA-16.000MHZ-STD-CSR-1/644-1049-2-ND/1128831, ESR="80 Ohm", Frequency=16MHz, Frequency Tolerance=15ppm, PartId=8509, Part Number=NX3225SA-16.000MHZ-STD-CSR-1, Price=0,3799, Supplier 1=Digi-Key, Type="MHz Crystal"

## Free pads (board coordinates)
  round 6 hole 3.3: 7(4,14) 9(4,57) 10(95,14) 10(95,57)
  round 4 hole 2: 12(78.74,20.32) 13(8.128,20.32) 14(20.32,20.32) 15(31.496,20.32) 16(43.18,20.32) 17(55.372,20.32) 18(67.056,20.32) 19(86.614,34.537) 19(89.154,48.761) 19(89.154,57.397) 19(90.17,11.677) 26(78.74,49.784) 27(67.056,49.784) 28(55.372,49.784) 29(43.688,49.784) 30(32.004,49.784) 31(20.32,49.784)
  round 2 hole 1.5: 34(78.74,58.928) 35(85.344,59.436)

## Via types
v1: diameter 0.6, hole 0.3, Top Layer to Bottom Layer, 135 vias

## Nets (pads, with @x,y where several pads share a name; then routed paths per layer and width w, separated by ;. In a path a pad name is that pad's centre, name@x,y a point inside that pad or via, vN(x,y) a via of type N, cw(c..) or ccw(c..) an arc to the next point about the centre after c; other vN are vias at no path point)
5V: C4.1 C5.1 C6.1 C10.+ C11.1 C14_S1.1 C14_S2.1 C14_S3.1 C14_S4.1 C14_S5.1 C14_S6.1 C14_S7.1 C14_S8.1 C14_S9.1 C14_S10.1 C14_S11.1 C14_S12.1 C14_S13.1 C14_S14.1 C15.1 IC1_S1.5 IC1_S2.5 IC1_S3.5 IC1_S4.5 IC1_S5.5 IC1_S6.5 IC1_S7.5 IC1_S8.5 IC1_S9.5 IC1_S10.5 IC1_S11.5 IC1_S12.5 IC1_S13.5 IC1_S14.5 ISCP1.2 JP2_S1.1 JP2_S2.1 JP2_S3.1 JP2_S4.1 JP2_S5.1 JP2_S6.1 JP2_S7.1 JP2_S8.1 JP2_S9.1 JP2_S10.1 JP2_S11.1 JP2_S12.1 JP2_S13.1 JP2_S14.1 JP4_S1.1 JP4_S2.1 JP4_S3.1 JP4_S4.1 JP4_S5.1 JP4_S6.1 JP4_S7.1 JP4_S8.1 JP4_S9.1 JP4_S10.1 JP4_S11.1 JP4_S12.1 JP4_S13.1 JP4_S14.1 MCP1.3 MCP2.18 Prog1.1 R1.2 R2.2 R3.1 R4.2 R5.2 R7.2 U1.4 U1.6 U1.18 U2.2 U2.4 | length 953.1
  Top Layer w0.381: v1(10.684,13.126) 10.887,13.126 C14_S8.1@10.887,12.206 ; v1(11.791,12.206) C14_S8.1@11.192,12.206 ; v1(16.02,58.391) IC1_S1.5@16.665,57.745 ; R5.2@18.172,40.386 R4.2@18.172,42.418 ; C14_S1.1@18.282,57.745 C14_S1.1@17.974,57.745 ; v1(18.787,58.544) 18.253,58.544 17.974,58.265 C14_S1.1@17.974,57.745 ; U2.2@21.031,35.052 15.358,35.052 10.659,30.353 10.659,18.485 9.643,17.469 9.643,12.46 9.897,12.206 C14_S8.1@10.693,12.206 C14_S8.1@10.887,12.206 ; v1(22.368,13.151) 22.955,13.151 ; C14_S9.1@22.377,12.206 23.034,12.206 ; IC1_S9.5@24.282,13.081 24.282,13.151 22.955,13.151 ; 24.539,27.153 24.539,31.391 ; v1(29.886,56.966) C14_S2.1@29.886,57.745 ; C14_S2.1@29.966,57.745 C14_S2.1@29.886,57.745 ; C6.1@30.134,40.224 C5.1@32.166,40.224 C4.1@34.198,40.224 34.738,40.224 34.738,39.567 35.144,39.161 35.144,30.688 29.799,25.343 ; IC1_S10.5@35.941,13.106 35.409,13.106 34.535,12.232 C14_S10.1@34.036,12.232 33.422,12.232 33.087,12.567 v1(33.087,12.954) 33.087,14.597 ; C14_S3.1@41.662,57.745 40.632,57.745 IC1_S3.5@39.757,56.871 ; 43.059,1.798 43.078,1.798 ; v1(45.507,13.056) IC1_S11.5@47.6,13.056 47.6,12.034 ; C14_S11.1@45.695,12.181 47.521,12.04 47.6,12.034 ; U1.4@45.769,33.889 46.453,34.573 46.451,34.575 46.445,34.581 48.979,34.581 ; U1.6@46.901,32.758 46.901,32.862 47.362,33.243 48.979,34.581 ; ISCP1.2@51.816,29.21 52.168,29.21 50.689,27.731 50.689,26.283 49.749,25.343 39.183,25.343 ; C14_S4.1@53.346,57.745 52.316,57.745 IC1_S4.5@51.441,56.871 51.441,64.373 55.388,68.32 ; 55.637,68.569 55.388,68.32 ; R3.1@55.764,43.18 55.764,40.49 ; C14_S12.1@57.404,12.206 57.903,12.206 58.777,13.081 IC1_S12.5@59.309,13.081 ; v1(58.721,14.65) 59.096,14.65 59.309,14.437 IC1_S12.5@59.309,13.081 ; Prog1.1@59.436,32.258 62.6,35.422 R7.2@64.262,35.422 65.523,35.422 65.661,35.56 MCP2.18@66.951,35.56 69.364,35.56 70.601,36.797 70.601,47.059 ; v1(63.113,55.442) IC1_S5.5@63.113,56.871 64.38,57.745 ; C14_S5.1@65.018,57.745 64.38,57.745 ; 68.58,68.58 68.195,68.58 ; C14_S13.1@69.215,12.181 69.714,12.181 70.588,13.056 IC1_S13.5@71.12,13.056 ; C11.1@70.601,47.879 70.601,47.059 ; v1(71.12,14.32) IC1_S13.5@71.12,13.056 ; v1(73.854,35.326) v1(73.13,34.602) 72.33,33.802 72.33,31.877 MCP1.3@73.774,31.877 75.098,31.877 75.109,31.888 C15.1@76.454,31.888 ; v1(74.311,55.493) 74.54,55.493 74.809,55.763 IC1_S6.5@74.809,56.871 ; C14_S6.1@76.714,57.745 75.684,57.745 IC1_S6.5@74.809,56.871 ; v1(80.102,13.101) 80.102,12.206 C14_S14.1@80.797,12.206 81.296,12.206 82.171,13.081 IC1_S14.5@82.702,13.081 ; C14_S7.1@80.772,57.288 81.076,57.288 v1(81.779,56.585) ; v1(86.071,55.468) 86.163,55.468 86.493,55.798 IC1_S7.5@86.493,56.871 ; C14_S8.1@10.887,12.206 C14_S8.1@11.192,12.206 ; C14_S8.1@11.192,12.206 12.067,13.081 IC1_S8.5@12.598,13.081 12.598,8.96 14.037,7.522 14.037,2.102 14.361,1.778 22.213,1.778 ; IC1_S1.5@16.665,57.745 C14_S1.1@17.974,57.745 ; IC1_S1.5@16.665,57.745 IC1_S1.5@16.377,56.871 16.377,54.042 17.39,53.029 17.39,47.691 18.172,46.908 R2.2@18.172,45.72 R4.2@18.172,42.418 ; R4.2@18.172,42.418 18.68,41.91 C10.+@21.73,41.91 22.927,41.91 27.229,37.608 U2.4@27.229,35.052 27.229,34.081 24.539,31.391 ; 22.213,1.778 43.059,1.778 43.078,1.798 ; 22.213,1.778 22.213,4.179 24.171,6.137 24.171,11.069 23.034,12.206 ; 22.955,13.151 22.955,12.285 23.034,12.206 ; 24.539,31.391 24.527,31.379 24.527,26.004 25.187,25.343 26.349,25.343 29.799,25.343 ; 29.799,25.343 34.594,25.343 ; C14_S2.1@29.886,57.745 28.935,57.745 IC1_S2.5@28.061,56.871 28.061,63.85 32.791,68.58 68.195,68.58 ; 33.087,14.597 33.569,15.08 ; 33.087,14.597 33.087,14.599 33.568,15.08 33.569,15.08 ; 33.569,15.08 40.045,15.08 v1(40.427,15.463) 40.808,15.844 40.808,16.352 40.808,22.27 ; 34.594,25.343 35.805,26.554 35.805,27.553 36.135,27.883 36.135,39.66 36.744,40.27 R1.2@37.592,40.27 37.592,43.234 40.453,46.095 40.453,54.798 39.757,55.493 IC1_S3.5@39.757,56.871 ; 34.594,25.343 39.183,25.343 ; 39.183,25.343 40.808,23.718 40.808,22.27 ; IC1_S3.5@39.757,56.871 39.757,64.536 43.745,68.523 43.948,68.32 55.388,68.32 ; 40.808,22.27 41.215,22.676 44.847,22.676 45.558,21.965 45.558,18.562 44.72,17.723 44.72,12.999 45.685,12.034 47.6,12.034 ; 43.078,1.798 54.483,1.798 ; 43.078,1.798 47.6,6.319 47.6,12.034 ; 48.979,34.581 49.855,34.581 U1.18@53.406,38.132 ; U1.18@53.406,38.132 U1.18@53.496,38.221 ; U1.18@53.406,38.132 53.406,38.221 U1.18@53.496,38.221 ; U1.18@53.496,38.221 55.764,40.49 ; U1.18@53.496,38.221 53.712,38.221 55.764,40.274 55.764,40.49 ; 54.483,1.798 66.208,1.798 ; 54.483,1.798 59.309,6.624 IC1_S12.5@59.309,13.081 ; 55.764,40.49 56.594,41.32 60.722,41.32 65.929,46.527 70.069,46.527 70.601,47.059 ; 64.38,57.745 63.237,58.888 63.237,63.621 68.195,68.58 ; 66.208,1.798 88.92,1.798 98.365,11.243 98.365,47.289 91.608,54.045 91.608,64.383 87.412,68.58 79.803,68.58 ; 66.208,1.798 71.12,6.709 IC1_S13.5@71.12,13.056 ; 68.195,68.58 79.803,68.58 ; IC1_S6.5@74.809,56.871 74.809,63.586 79.803,68.58
  Bottom Layer w0.381: v1(10.684,13.126) 10.684,15.291 JP4_S8.1@10.693,15.291 ; v1(11.791,12.206) 14.875,15.291 JP2_S8.1@16.027,15.291 ; JP2_S1.1@12.948,54.661 13.585,54.661 14.394,55.469 14.394,56.764 v1(16.02,58.391) ; JP4_S1.1@18.282,54.661 18.282,57.153 18.787,57.658 v1(18.787,58.544) ; v1(22.368,13.151) 22.368,15.291 JP4_S9.1@22.377,15.291 23.282,15.291 23.282,14.345 23.714,13.913 27.28,13.913 27.711,14.345 JP2_S9.1@27.711,15.291 ; JP2_S2.1@24.632,54.661 24.654,54.661 27.569,57.576 35.754,57.398 ; JP4_S2.1@29.966,54.661 29.988,54.661 29.988,56.865 v1(29.886,56.966) 30.318,57.398 35.754,57.398 ; v1(33.087,12.954) 33.087,15.075 33.328,15.316 JP4_S10.1@34.036,15.316 ; JP2_S10.1@39.37,15.316 40.281,15.316 v1(40.427,15.463) ; v1(45.507,13.056) 45.507,15.265 JP4_S11.1@45.695,15.265 45.695,14.841 46.358,14.841 46.982,14.216 49.952,14.216 50.214,14.478 50.214,15.166 50.314,15.265 JP2_S11.1@51.029,15.265 ; JP2_S4.1@48.012,54.661 48.022,54.661 49.464,56.103 52.579,56.103 52.866,55.816 52.866,55.074 52.594,54.802 52.416,54.802 52.416,54.661 JP4_S4.1@53.331,54.661 ; ISCP1.2@51.816,29.21 54.864,32.258 Prog1.1@59.436,32.258 65.755,38.577 69.155,38.577 ; JP4_S4.1@53.346,54.661 JP4_S4.1@53.331,54.661 ; JP4_S12.1@57.404,15.291 58.08,15.291 ; v1(58.721,14.65) 58.08,15.291 ; JP2_S5.1@59.684,54.661 59.681,54.661 59.681,56.204 58.69,57.195 52.188,57.195 ; JP2_S12.1@62.738,15.291 61.865,15.291 61.173,14.599 58.919,14.599 58.227,15.291 58.08,15.291 ; v1(63.113,55.442) 64.208,55.442 64.989,54.661 JP4_S5.1@65.018,54.661 ; JP4_S13.1@69.215,15.265 69.993,15.265 69.993,14.777 70.45,14.32 v1(71.12,14.32) 74.057,14.32 74.549,14.812 JP2_S13.1@74.549,15.265 JP2_S13.1@74.87,15.265 ; JP2_S6.1@71.38,54.661 71.39,54.661 71.39,54.985 72.152,55.747 74.057,55.747 v1(74.311,55.493) 75.149,55.493 75.982,54.661 JP4_S6.1@76.714,54.661 ; v1(73.13,34.602) 69.155,38.577 ; v1(73.854,35.326) 81.423,35.326 90.719,26.029 90.719,15.818 89.551,14.65 87.398,14.65 86.757,15.291 JP2_S14.1@86.147,15.291 ; v1(80.102,13.101) 80.797,13.796 80.797,14.752 ; JP4_S14.1@80.797,15.291 80.797,14.752 ; JP2_S7.1@83.064,54.661 84.629,54.661 85.436,55.468 v1(86.071,55.468) 84.954,56.585 v1(81.779,56.585) 81.076,57.288 38.311,57.288 36.338,55.315 ; JP2_S14.1@86.131,15.291 JP2_S14.1@86.147,15.291 ; JP4_S7.1@88.398,54.661 89.17,54.661 89.399,54.432 89.399,52.445 75.53,38.577 69.155,38.577 ; 35.754,57.398 36.338,56.814 36.338,55.315 ; JP2_S3.1@36.338,54.667 36.338,54.661 JP2_S3.1@36.328,54.661 JP2_S3.1@36.338,54.667 ; JP2_S3.1@36.338,54.667 36.846,54.999 38.093,56.246 40.259,56.246 41.52,54.661 JP4_S3.1@41.662,54.661 42.434,54.661 44.968,57.195 52.188,57.195 ; JP2_S3.1@36.338,54.667 36.338,55.315 ; 52.188,57.195 53.331,56.052 JP4_S4.1@53.331,54.661 ; 80.797,14.752 81.331,14.218 85.614,14.218 86.147,14.752 JP2_S14.1@86.147,15.291
24V: IC1_S1.8 IC1_S2.8 IC1_S3.8 IC1_S4.8 IC1_S5.8 IC1_S6.8 IC1_S7.8 IC1_S8.8 IC1_S9.8 IC1_S10.8 IC1_S11.8 IC1_S12.8 IC1_S13.8 IC1_S14.8 pad.12 pad.13 pad.14 pad.15 pad.16 pad.17 pad.18 pad.26 pad.27 pad.28 pad.29 pad.30 pad.31 pad.34 pad.35 R10_S1.2 R10_S2.2 R10_S3.2 R10_S4.2 R10_S5.2 R10_S6.2 R10_S7.2 R10_S8.2 R10_S9.2 R10_S10.2 R10_S11.2 R10_S12.2 R10_S13.2 R10_S14.2 WJ45C-B-2P.2 | length 467.7
  Top Layer w0.508: IC1_S1.8@12.567,56.871 12.567,58.287 13.716,59.436 17.78,59.436 R10_S1.2@17.78,61.468 ; IC1_S8.8@16.408,13.081 16.408,12.548 17.913,11.043 20.32,11.043 ; 20.453,58.045 24.251,58.045 IC1_S2.8@24.251,56.871 ; IC1_S9.8@28.092,13.081 28.092,11.532 31.477,11.532 ; 32.004,58.928 32.391,58.541 35.947,58.541 IC1_S3.8@35.947,56.871 ; IC1_S10.8@39.751,13.106 39.751,12.065 42.59,12.065 ; 44.329,58.299 47.631,58.299 IC1_S4.8@47.631,56.871 ; IC1_S11.8@51.41,13.056 51.41,11.582 54.807,11.582 ; 55.505,58.045 59.303,58.045 IC1_S5.8@59.303,56.871 ; IC1_S12.8@63.119,13.081 63.119,11.557 63.557,11.119 67.056,11.119 ; 67.177,58.033 70.999,58.033 IC1_S6.8@70.999,56.871 ; IC1_S13.8@74.93,13.056 74.93,11.938 75.184,11.684 78.099,11.684 ; pad.34@78.74,58.928 81.788,58.928 82.683,58.033 IC1_S7.8@82.683,56.871 ; R10_S14.2@81.299,8.484 82.652,8.484 86.512,12.344 IC1_S14.8@86.512,13.081
  Top Layer w0.8: R10_S1.2@17.78,61.468 17.78,60.192 18.914,60.192 20.453,58.653 20.453,58.045 ; 31.477,11.532 31.477,11.094 32.543,10.027 32.543,9.468 32.747,9.265 34.538,9.265 R10_S10.2@34.538,8.509 ; R10_S3.2@41.16,61.468 41.16,60.192 42.436,60.192 43.688,58.94 44.329,58.299 ; 42.59,12.065 42.612,12.065 44.7,9.976 46.197,9.976 R10_S11.2@46.197,8.458 ; R10_S4.2@52.844,61.468 52.844,60.192 54.807,60.192 55.505,59.495 55.505,58.045 ; 54.807,11.582 54.829,11.582 56.664,9.748 57.906,9.748 R10_S12.2@57.906,8.484 ; R10_S5.2@64.516,61.468 64.516,60.694 67.177,58.033 ; 78.099,11.684 78.74,11.043 80.035,9.748 81.299,9.748 R10_S14.2@81.299,8.484
  Top Layer w1.778: pad.13@8.128,20.32 8.128,11.551 R10_S8.2@11.195,8.484 ; R10_S1.2@17.78,61.468 20.32,58.928 pad.31@20.32,49.784 ; pad.14@20.32,20.32 20.32,11.043 R10_S9.2@22.879,8.484 ; R10_S2.2@29.464,61.468 32.004,58.928 pad.30@32.004,49.784 ; pad.15@31.496,20.32 31.496,11.551 R10_S10.2@34.538,8.509 ; R10_S3.2@41.16,61.468 43.688,58.94 pad.29@43.688,49.784 ; pad.16@43.18,20.32 43.18,11.475 R10_S11.2@46.197,8.458 ; R10_S4.2@52.844,61.468 55.372,58.94 pad.28@55.372,49.784 ; pad.17@55.372,20.32 55.372,11.018 R10_S12.2@57.906,8.484 ; R10_S5.2@64.516,61.468 67.056,58.928 pad.27@67.056,49.784 ; pad.18@67.056,20.32 67.056,11.119 R10_S13.2@69.717,8.458 ; R10_S6.2@76.212,61.468 78.74,58.94 pad.34@78.74,58.928 pad.26@78.74,49.784 ; pad.12@78.74,20.32 78.74,11.043 R10_S14.2@81.299,8.484 ; pad.35@85.344,59.436 R10_S7.2@87.896,61.468
  Top Layer w3.81: pad.12@78.74,20.32 78.74,21.336 81.788,24.384 81.788,39.472 ; pad.26@78.74,49.784 81.788,46.736 81.788,39.472 ; WJ45C-B-2P.2@92.456,39.472 81.788,39.472
  Bottom Layer w1.778: pad.34@78.74,58.928 82.804,58.928 pad.35@85.344,59.436
  Bottom Layer w3.81: pad.13@8.128,20.32 pad.14@20.32,20.32 pad.15@31.496,20.32 pad.16@43.18,20.32 pad.17@55.372,20.32 pad.18@67.056,20.32 pad.12@78.74,20.32 ; pad.31@20.32,49.784 pad.30@32.004,49.784 pad.29@43.688,49.784 pad.28@55.372,49.784 pad.27@67.056,49.784 pad.26@78.74,49.784
AREF: C7.1 U1.20 | length 7.3
  Top Layer w0.254: C7.1@49.922,45.212 49.922,44.419 52.67,41.671 52.67,39.659 U1.20@52.275,39.263
C_CS: MCP2.16 U1.14 | length 34.5
  Top Layer w0.254: U1.14@52.84,34.455 53.432,33.863 53.432,29.712 53.327,29.607 53.327,26.127 53.813,25.641 54.873,25.641 55.867,26.635 55.867,30.246 56.506,30.884 56.506,36.469 58.436,38.399 60.443,38.399 61.763,37.078 63.16,37.078 63.338,37.256 63.338,37.891 63.547,38.1 MCP2.16@66.951,38.1
CANH: MCP1.7 P1.5 P2.5 R6.1 | length 103.2
  Top Layer w0.254: P2.5@3.048,24.892 1.486,26.454 1.486,42.126 P1.5@3.048,43.688 ; MCP1.7@68.974,30.607 70.45,30.607 73.36,27.697 R6.1@74.295,27.697 v1(75.276,27.697)
  Bottom Layer w0.254: P2.5@3.048,24.892 4.121,23.819 73.625,23.819 75.276,25.47 v1(75.276,27.697)
CANL: E_C1.2 MCP1.6 P1.6 P2.6 | length 102.4
  Top Layer w0.254: P2.6@5.588,24.892 4.512,25.968 4.512,42.612 P1.6@5.588,43.688 ; v1(68.444,26.715) 67.377,27.782 67.377,31.09 68.164,31.877 MCP1.6@68.974,31.877
  Bottom Layer w0.254: P2.6@5.588,24.892 15.748,24.892 E_C1.2@17.018,26.162 17.018,25.394 20.819,25.394 21.502,24.711 73.32,24.711 73.6,24.991 73.6,25.699 72.584,26.715 v1(68.444,26.715)
CTAL1: C12.1 MCP2.8 Y2.1 | length 31.9
  Top Layer w0.254: Y2.1@63.162,25.87 62.431,25.87 62.17,26.131 62.17,29.199 62.551,29.58 ; C12.1@63.246,29.58 62.551,29.58 ; MCP2.8@76.051,44.45 73.148,44.45 72.355,43.657 72.355,37.332 69.383,34.36 63.567,34.36 61.433,32.227 61.433,30.601 62.551,29.58
CTAL2: C13.1 MCP2.7 Y2.3 | length 23
  Top Layer w0.254: Y2.3@65.362,27.47 65.362,28.417 65.532,28.587 C13.1@65.532,29.58 66.208,29.58 66.412,29.783 66.412,31.414 67.478,32.481 70.095,32.481 74.032,36.418 74.032,42.672 74.54,43.18 MCP2.7@76.051,43.18